# Altium PCB 测试板.PcbDoc
Units mil, origin at the board's own origin, x right, y up, seen from the top; angles counter-clockwise.
Board outline 3950.13 x 2830.03 mil, 2 copper layers (Top Layer, Bottom Layer); 4 components, 19 nets, 86 pads, 0 vias.
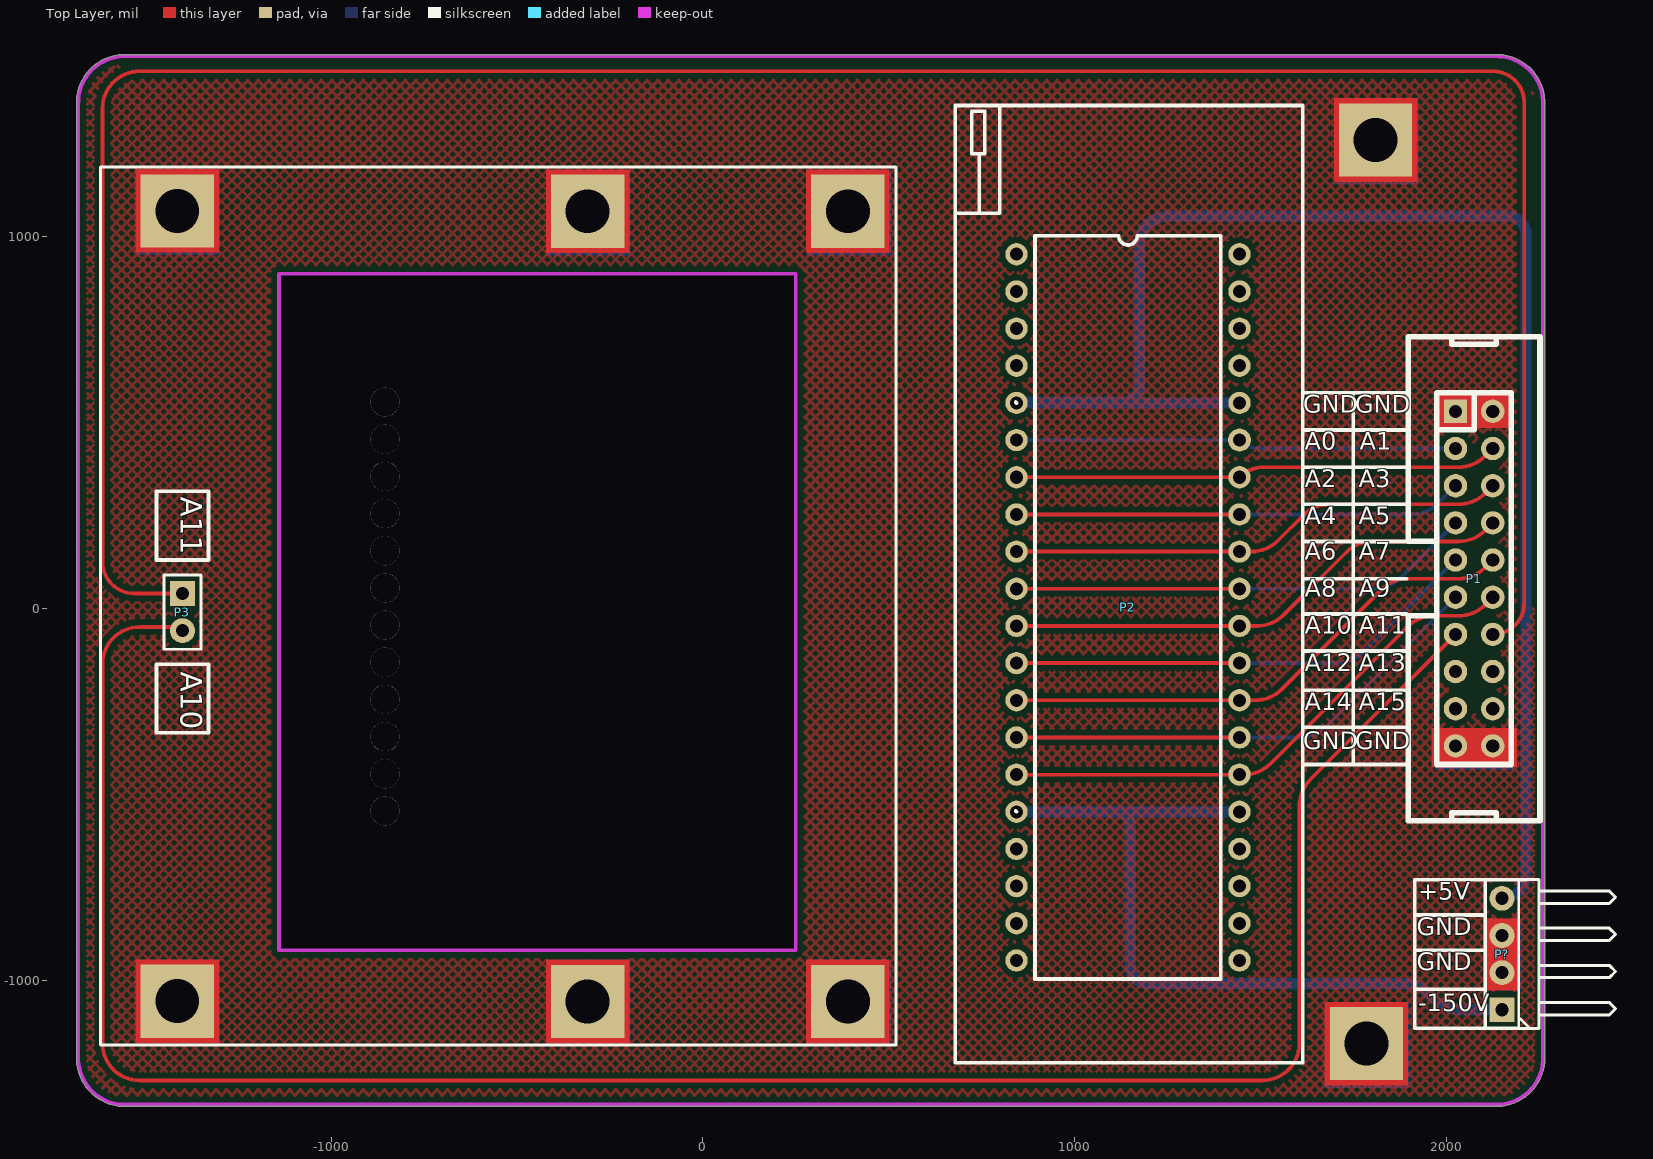
[diagram p0: Top Layer view]
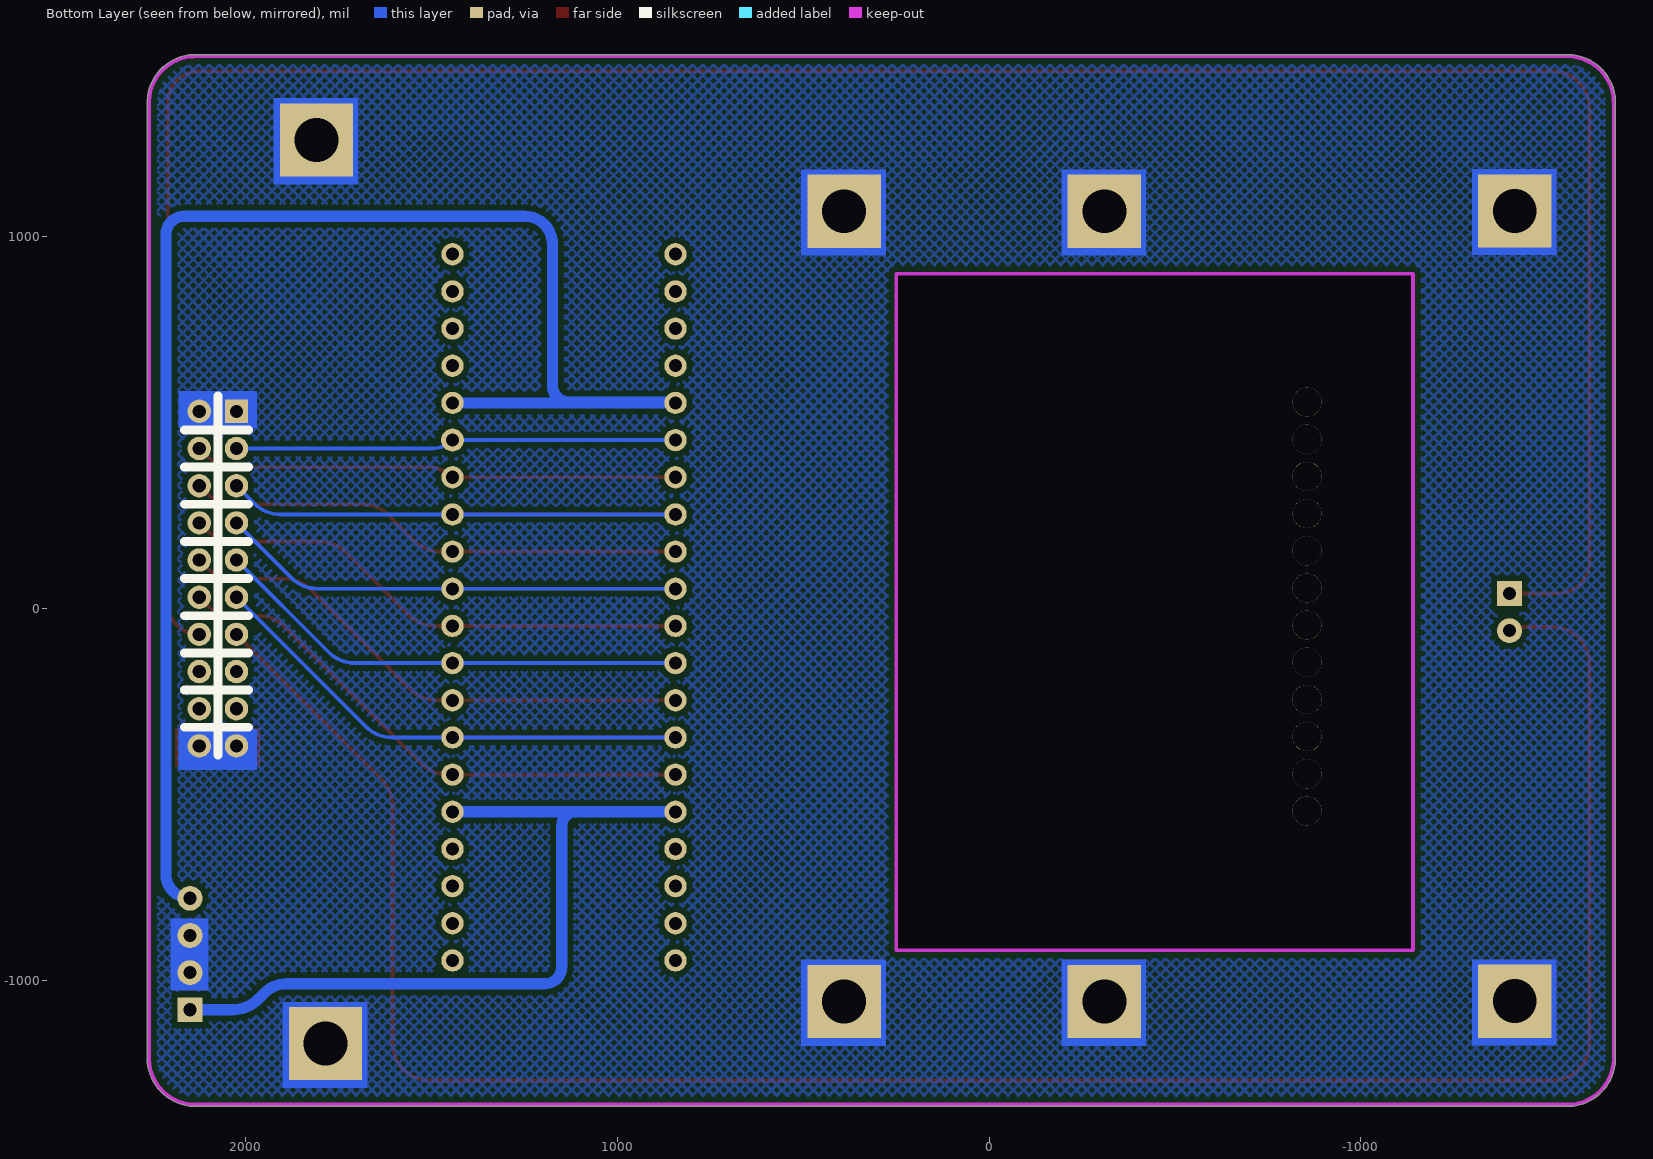
[diagram p1: Bottom Layer view, seen from below]

## Layer stack, top to bottom
Top Solder: solder mask 0.4, Solder Resist, Dk 3.5
Top Layer: signal copper 1.4
Dielectric 1: dielectric 12.6, FR-4, Dk 4.8
Bottom Layer: signal copper 1.4
Bottom Solder: solder mask 0.4, Solder Resist, Dk 3.5

## Board outline
-1685.01,-1215 -1685.01,1354.9 cw(c-1555,1360) -1560.2,1490.01 cw(c-1560,1485) -1560,1490.02 2129.9,1490.02 cw(c2135,1360) 2265.01,1365.2 cw(c2260,1365) 2265.02,1365 2265.02,-1204.9 cw(c2135,-1210) 2265.11,-1210 cw(c2135,-1210) 2140.2,-1340.01 cw(c2140,-1335) 2140,-1340.02 -1549.9,-1340.02 cw(c-1555,-1210) -1685.01,-1215.2 cw(c-1680,-1215)
cut-out: -1140,-920 250,-920 250,900 -1140,900

## Design rules (kind name [scope] priority, off if disabled: settings)
Clearance [All] p1: gap=15
PolygonConnect [All] p1: connectstyle=Relief reliefconductorwidth=10 reliefentries=4 polygonreliefangle="90 Angle" airgapwidth=10
RoutingVias [All] p1: holewidth=28 width=50 viastyle="Through Hole" minholewidth=28 minwidth=50 maxholewidth=28 maxwidth=50
SolderMaskExpansion [All] p1: expansion=4
Width [All] p1: maxlimit=10 minlimit=10 preferedwidth=10
30 further rules are at their usual default settings.

## Components (designator, comment, footprint, x,y, rotation, side; value= is the part's Value field where it differs from the comment)
P1 "Header 10X2" IDC2.54-20P 2025,530 r270 top
P2 "Header 20" 51插座 1135,40 r0 top
P3 "Header 2" HDR-1x2 -1400,40 r270 top
P? "Header 4" HDR-1X4_H 2150,-1080 r90 top

## Footprints (in the part's own frame and the unit in brackets; to place one, negate y for a bottom-side part, rotate by r counter-clockwise, add the part's x,y. Pads: shape width x height; smd on the part's side, far side on the other; paste and mask are expansions set on the pad)
51插座 [mil]
  round 60 hole 35: 1(-291.22,912.72) 2(-291.22,812.72) 3(-291.22,712.72) 4(-291.22,612.72) 5(-291.22,512.72) 6(-291.22,412.72) 7(-291.22,312.72) 8(-291.22,212.72) 9(-291.22,112.72) 10(-291.22,12.72) 11(-291.22,-87.28) 12(-291.22,-187.28) 13(-291.22,-287.28) 14(-291.22,-387.28) 15(-291.22,-487.28) 16(-291.22,-587.28) 17(-291.22,-687.28) 18(-291.22,-787.28) 19(-291.22,-887.28) 20(-291.22,-987.28) 21(308.78,-987.28) 22(308.78,-887.28) 23(308.78,-787.28) 24(308.78,-687.28) 25(308.78,-587.28) 26(308.78,-487.28) 27(308.78,-387.28) 28(308.78,-287.28) 29(308.78,-187.28) 30(308.78,-87.28) 31(308.78,12.72) 32(308.78,112.72) 33(308.78,212.72) 34(308.78,312.72) 36(308.78,512.72) 37(308.78,612.72) 38(308.78,712.72) 39(308.78,812.72) 40(308.78,912.72)
  round 62 hole 35: 35(308.78,412.72)
  silkscreen extent -456,-1262 479,1313
HDR-1x2 [mm] "排针，2脚"
  rect 1.7x1.7 hole 0.9: 1(0,0)
  round 1.7 hole 0.9: 2(2.54,0)
  silkscreen extent -1.27,-1.27 3.81,1.27, body extent -1.27,-1.27 3.81,1.27, height 8.5
HDR-1X4_H [mm] "弯脚排针，4脚"
  rect 1.7x1.7 hole 0.9: 1(0,0)
  round 1.7 hole 0.9: 2(2.54,0) 3(5.08,0) 4(7.62,0)
  silkscreen extent -1.27,-7.76 8.89,-1.14, body extent -1.27,-7.77 8.89,1.27, height 4.85
IDC2.54-20P [mm] "20P简易牛角座"
  rect 1.6x1.6 hole 0.9: 1(0,0)
  round 1.6 hole 0.9: 2(0,2.54) 3(2.54,0) 4(2.54,2.54) 5(5.08,0) 6(5.08,2.54) 7(7.62,0) 8(7.62,2.54) 9(10.16,0) 10(10.16,2.54) 11(12.7,0) 12(12.7,2.54) 13(15.24,0) 14(15.24,2.54) 15(17.78,0) 16(17.78,2.54) 17(20.32,0) 18(20.32,2.54) 19(22.86,0) 20(22.86,2.54)
  silkscreen extent -5.11,-3.23 27.97,5.77, body extent -5.08,-3.08 27.94,5.77, height 9.17

## Part data
P1: "Header, 10-Pin, Dual row"
P2: "Header, 20-Pin"
P3: "Header, 2-Pin"
P?: "Header, 4-Pin"

## Free pads (board coordinates)
  rect 196.85x196.85 hole 118.11: 1(-1414.05,1069.17) 3(-1414.05,-1056.81) 3(-309.8,-1057.64) 3(-309.8,1068.35) 3(390,-1057.64) 3(390,1068.35) 3(1785.2,-1170.83) 3(1810,1260)
  round 78.74 hole 78.74: 2(-855,-445) 3(-855,-345) 4(-855,-245) 5(-855,-145) 6(-855,-45) 7(-855,55) 8(-855,155) 9(-855,255) 10(-855,355) 11(-855,455) 13(-855,555) 24(-855,-545)

## Nets (pads, with @x,y where several pads share a name; then routed paths per layer and width w, separated by ;. In a path a pad name is that pad's centre, name@x,y a point inside that pad or via, vN(x,y) a via of type N, cw(c..) or ccw(c..) an arc to the next point about the centre after c; other vN are vias at no path point)
+5V: P2.5 P2.36 P?.4 | length 4271.7
  Bottom Layer w30: P2.36 P2.5 cw(c846.06,552.72) 846.06,555 1130,555 ccw(c1130,600) 1175,600 1175,980 cw(c1250,980) 1250,1055 2165,1055 cw(c2165,1005) 2215,1005 2215,-715 cw(c2150,-715) P?.4
-150V: P2.16 P2.25 P?.1 | length 2086
  Bottom Layer w30: P2.16 1112.28,-547.28 ; P2.25 1112.28,-547.28 ; P?.1 2036.42,-1080 cw(c2036.42,-980) 1965.71,-1050.71 1949.75,-1034.75 ccw(c1890,-1094.5) 1890,-1010 1195,-1010 cw(c1195,-965) 1150,-965 1150,-585 ccw(c1112.28,-585) 1112.28,-547.28
A0: P1.3 P2.6 P2.35 | length 1187.3
  Bottom Layer w10: P2.6 P2.35 ccw(c1498.62,507.56) 1498.62,430 P1.3
A1: P1.4 P2.7 P2.34 | length 1331
  Top Layer w10: P2.7@862.21,334.29 P2.7 P2.34 cw(c1509.65,286.85) 1509.65,380 2033.58,380 ccw(c2033.58,480) 2104.29,409.29 P1.4
A2: P1.5 P2.8 P2.33 | length 1808.9
  Top Layer w10: P2.8 P2.33
  Bottom Layer w10: P2.8 P2.33 1906.3,252.72 ccw(c1906.3,352.72) 1977.01,282.01 P1.5
A3: P1.6 P2.9 P2.32 | length 1367.2
  Top Layer w10: P2.9@861.77,170.71 P2.9 P2.32 1476.3,152.72 ccw(c1476.3,252.72) 1547.01,182.01 1615.71,250.71 cw(c1686.42,180) 1686.42,280 2033.58,280 ccw(c2033.58,380) 2104.29,309.29 P1.6
A4: P1.7 P2.10 P2.31 | length 1850.3
  Top Layer w10: P2.10 P2.31
  Bottom Layer w10: P2.10 P2.31 1806.3,52.72 ccw(c1806.3,152.72) 1877.01,82.01 P1.7
A5: P1.8 P2.11 P2.30 | length 1383.2
  Top Layer w10: P2.11 P2.30 1491.3,-47.28 ccw(c1491.3,52.72) 1562.01,-17.99 1730.71,150.71 cw(c1801.42,80) 1801.42,180 2033.58,180 ccw(c2033.58,280) 2104.29,209.29 P1.8
A6: P1.9 P2.12 P2.29 | length 1891.8
  Top Layer w10: P2.12 P2.29
  Bottom Layer w10: P2.12 P2.29 1706.3,-147.28 ccw(c1706.3,-47.28) 1777.01,-117.99 P1.9
A7: P1.10 P2.13 P2.28 | length 1450
  Top Layer w10: P2.13@861.77,-229.29 P2.13 P2.28 1486.3,-247.28 ccw(c1486.3,-147.28) 1557.01,-217.99 1825.71,50.71 cw(c1896.42,-20) 1896.42,80 2033.58,80 ccw(c2033.58,180) 2104.29,109.29 P1.10
A8: P1.11 P2.14 P2.27 | length 1933.2
  Top Layer w10: P2.14 P2.27
  Bottom Layer w10: P2.14 P2.27 1606.3,-347.28 ccw(c1606.3,-247.28) 1677.01,-317.99 P1.11 ; P1.11 ccw(c1964.64,90.36) P1.11 P1.11
A9: P1.12 P2.15 P2.26 | length 1491.5
  Top Layer w10: P2.15@861.77,-429.29 P2.15 P2.26 1456.3,-447.28 ccw(c1456.3,-347.28) 1527.01,-417.99 1895.71,-49.29 cw(c1966.42,-120) 1966.42,-20 2033.58,-20 ccw(c2033.58,80) 2104.29,9.29 P1.12
A10: P1.13 P3.2 | length 5901.6
  Top Layer w10: P3.2 ccw(c-1410,-60) -1410,-50 -1515,-50 ccw(c-1515,-150) -1615,-150 -1615,-1170 ccw(c-1515,-1170) -1515,-1270 1505,-1270 ccw(c1505,-1170) 1605,-1170 1605,-531.42 cw(c1705,-531.42) 1634.29,-460.71 P1.13
A11: P1.14 P3.1 | length 6892.6
  Top Layer w10: P3.1 -1530,40 cw(c-1530,125) -1615,125 -1615,1345 cw(c-1515,1345) -1515,1445 2125,1445 cw(c2125,1360) 2210,1360 2210,15 cw(c2125,15) P1.14
GND: P1.1 P1.2 P1.19 P1.20 P?.2 P?.3 pad.1 pad.3@390,1068.35 pad.3@390,-1057.64 pad.3@1785.2,-1170.83 pad.3@1810,1260 pad.3@-309.8,1068.35 pad.3@-309.8,-1057.64 pad.3@-1414.05,-1056.81
PC12: P1.15
PC13: P1.16
PC14: P1.17
PC15: P1.18
pads on no net: P2.1 P2.2 P2.3 P2.4 P2.17 P2.18 P2.19 P2.20 P2.21 P2.22 P2.23 P2.24 P2.37 P2.38 P2.39 P2.40

## Polygon pours and split planes (outlines as drawn)
GND on Top Layer "Bottom Layer-No Net" (hatched 45Degree grid 20 track 8, remove dead copper, pour order 6): -1672.52,1365 -1642.52,1445 -1567.52,1485 2142.48,1485 2212.48,1465 2252.48,1425 2267.48,1365 2267.48,-1215 2252.48,-1265 2212.48,-1315 2147.48,-1335 -1542.52,-1335 -1612.52,-1320 -1657.52,-1275 -1672.52,-1210 -1672.52,1365
GND on Bottom Layer "Bottom Layer-No Net" (hatched 45Degree grid 20 track 8, remove dead copper, pour order 4): -1680,1365 -1650,1445 -1575,1485 2135,1485 2205,1465 2245,1425 2260,1365 2260,-1215 2245,-1265 2205,-1315 2140,-1335 -1550,-1335 -1620,-1320 -1665,-1275 -1680,-1210 -1680,1365

## Keep-outs
Keep-Out Layer:
  lines w10: 2130,1485 cw(c2135,1360) 2260,1365 2260,-1215 ; 2135,1485 -1560,1485 ccw(c-1555,1360) -1680,1355 -1680,-1215 ccw(c-1555,-1210) -1550,-1335 2140,-1335 ccw(c2135,-1210) 2260,-1205 ; -1140,-920 -1140,900 250,900 250,-920 -1140,-920

## Other copper
Top Layer:
  rectangle net GND: 1970,485 2175,585
  rectangle net GND: 1960,-426.52 2190,-322.02
  rectangle net GND: 2105.28,-1027.54 2195,-835
  rectangle net GND: 1672.77,-1283.25 1897.62,-1058.4
  rectangle net GND: 1697.57,1147.57 1922.43,1372.43
  rectangle net GND: -1526.48,956.75 -1301.63,1181.6
  rectangle net GND: -422.23,955.92 -197.38,1180.77
  rectangle net GND: 277.57,955.92 502.43,1180.77
  rectangle net GND: 277.57,-1170.06 502.43,-945.21
  rectangle net GND: -422.23,-1170.06 -197.38,-945.21
  rectangle net GND: -1526.48,-1169.24 -1301.63,-944.39
Bottom Layer:
  rectangle net GND: 2100,-1027.54 2202.46,-835
  rectangle net GND: 1970,-435.52 2181,-325
  rectangle net GND: 1970,485 2181,585
  rectangle net GND: -1526.48,-1175.98 -1298.38,-944.39
  rectangle net GND: -422.23,-1176.81 -194.13,-945.21
  rectangle net GND: 277.57,-1176.81 505.67,-945.21
  rectangle net GND: 1672.77,-1290 1900.87,-1058.4
  rectangle net GND: 1697.57,1140.83 1925.67,1372.43
  rectangle net GND: 277.57,949.17 505.67,1180.77
  rectangle net GND: -422.23,949.17 -194.13,1180.77
  rectangle net GND: -1526.48,950 -1298.38,1181.6

## Silkscreen, mask and mechanical layers (free items; w line width, h text height)
Top Overlay:
  lines w7.87: -1620,-1174.92 -1620,1187.28 520,1187.28 520,-1174.92 -1620,-1174.92
  lines w10: 841.5,-545 843.78,-547.28 ; 841.5,555 843.78,552.72 ; 1613.78,-420 1895,-420 ; 1613.78,-320 1892.84,-320 ; 1613.78,-220 1892.84,-220 ; 1613.78,-115 1895,-115 ; 1613.78,-15 1892.84,-15 ; 1613.78,80 1892.84,80 ; 1613.78,180 1892.84,180 ; 1613.78,280 1895,280 ; 1615,480 1892.84,480 ; 1618.78,380 1892.84,380 ; 1618.78,580 1892.84,580 ; 1750,-420 1750,580 ; 1915,-1025 2100,-1025 ; 1915,-920 2100,-920 ; 1915,-825 2100,-825 ; 2105,-1130 2105,-730 ; 2195,-1130 1915,-1130 1915,-730 2215,-730 ; -1470,-335 -1330,-335 -1330,-150 -1470,-150 -1470,-335 ; -1470,130 -1470,315 -1330,315 -1330,130 -1470,130
  text "GND" at 1615,510 h80
  text "GND" at 1755,510 h80
  text "A0" at 1620,410 h80
  text "A1" at 1767,410 h80
  text "A2" at 1620,310 h80
  text "A3" at 1765,310 h80
  text "A11" at -1425,300 h100 r270
  text "A4" at 1620,210 h80
  text "A5" at 1765,210 h80
  text "A6" at 1620,115 h80
  text "A7" at 1765,115 h80
  text "A8" at 1620,15 h80
  text "A9" at 1765,15 h80
  text "A10" at 1620,-85 h80
  text "A11" at 1765,-85 h80
  text "A10" at -1425,-170 h100 r270
  text "A12" at 1620,-185 h80
  text "A13" at 1765,-185 h80
  text "A14" at 1620,-290 h80
  text "A15" at 1765,-290 h80
  text "GND" at 1615,-395 h80
  text "GND" at 1755,-395 h80
  text "+5V" at 1925,-800 h80
  text "GND" at 1920,-895 h80
  text "GND" at 1920,-990 h80
  text "-150V" at 1925,-1100 h80